# Altium PCB PCB.pcbdoc
Units mm, origin at the board's own origin, x right, y up, seen from the top; angles counter-clockwise.
Board outline 104.39 x 73.91 mm, 2 copper layers (Top Layer, Bottom Layer); 61 components, 39 nets, 209 pads, 35 vias.
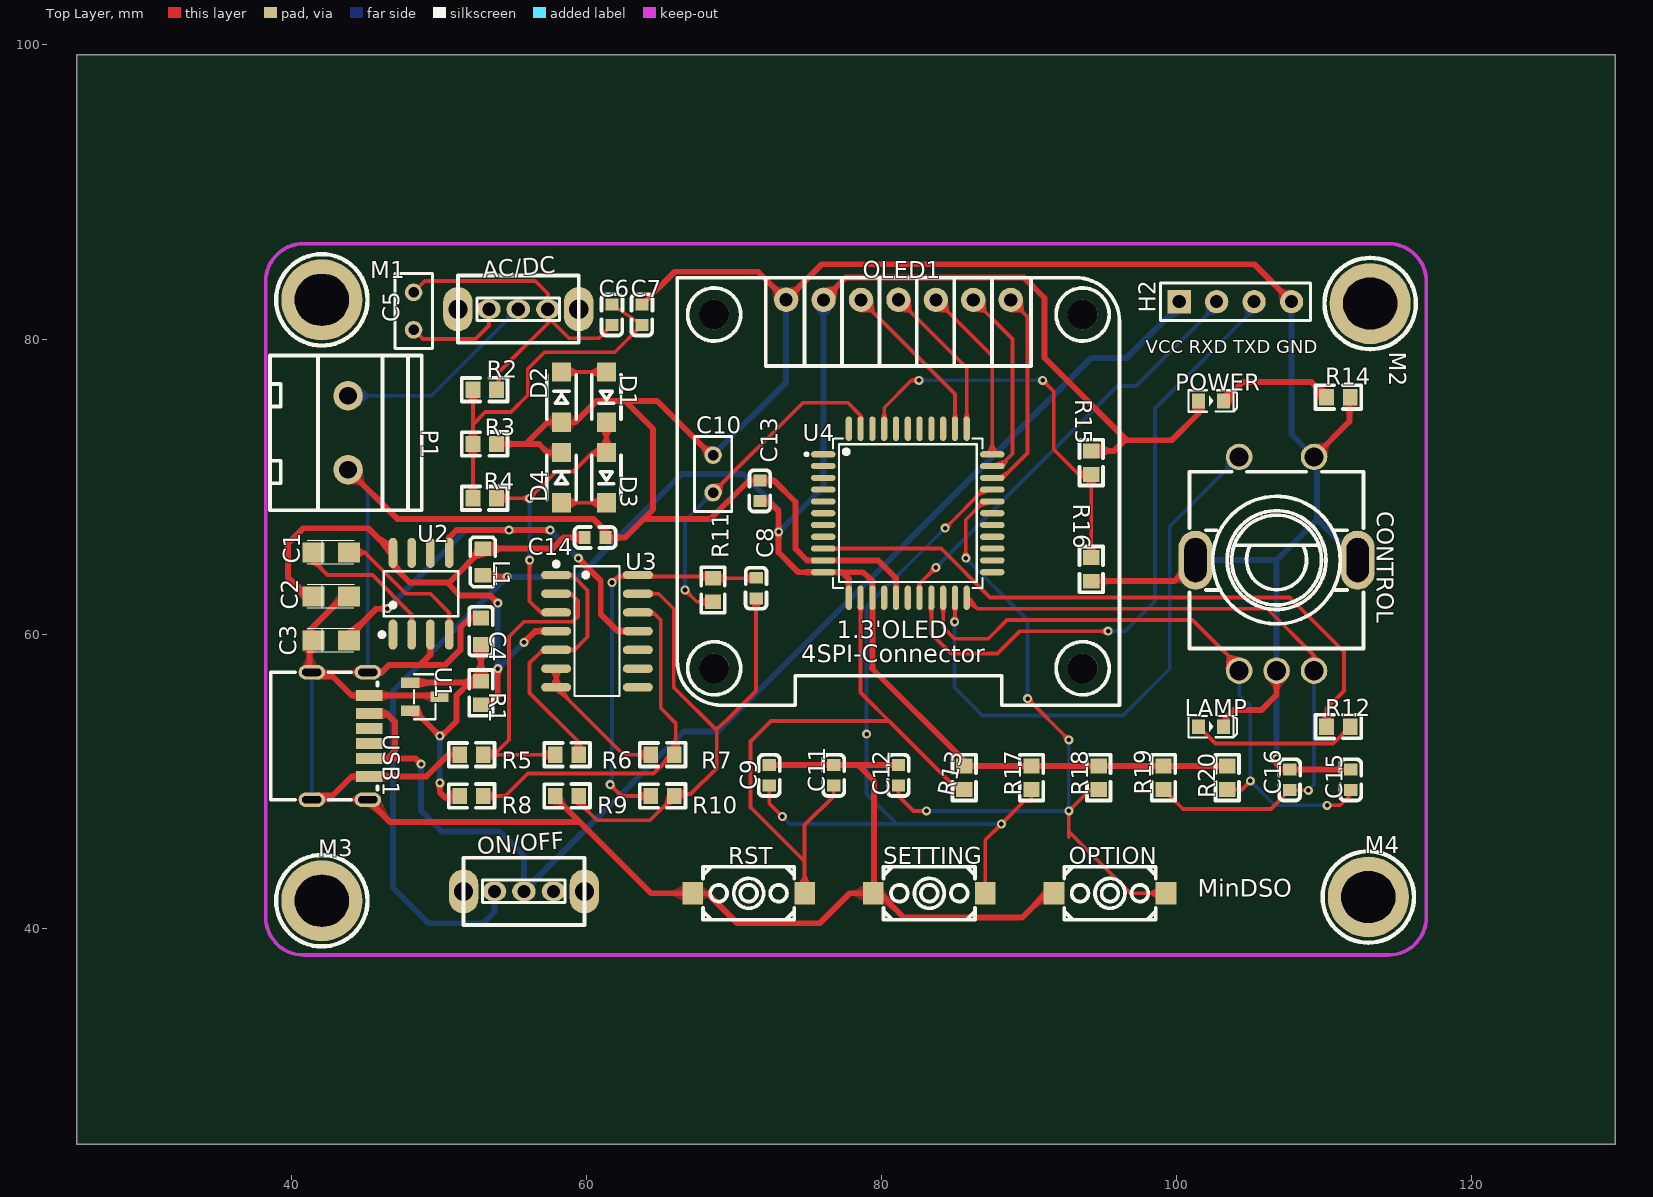
[diagram p0: Top Layer view]
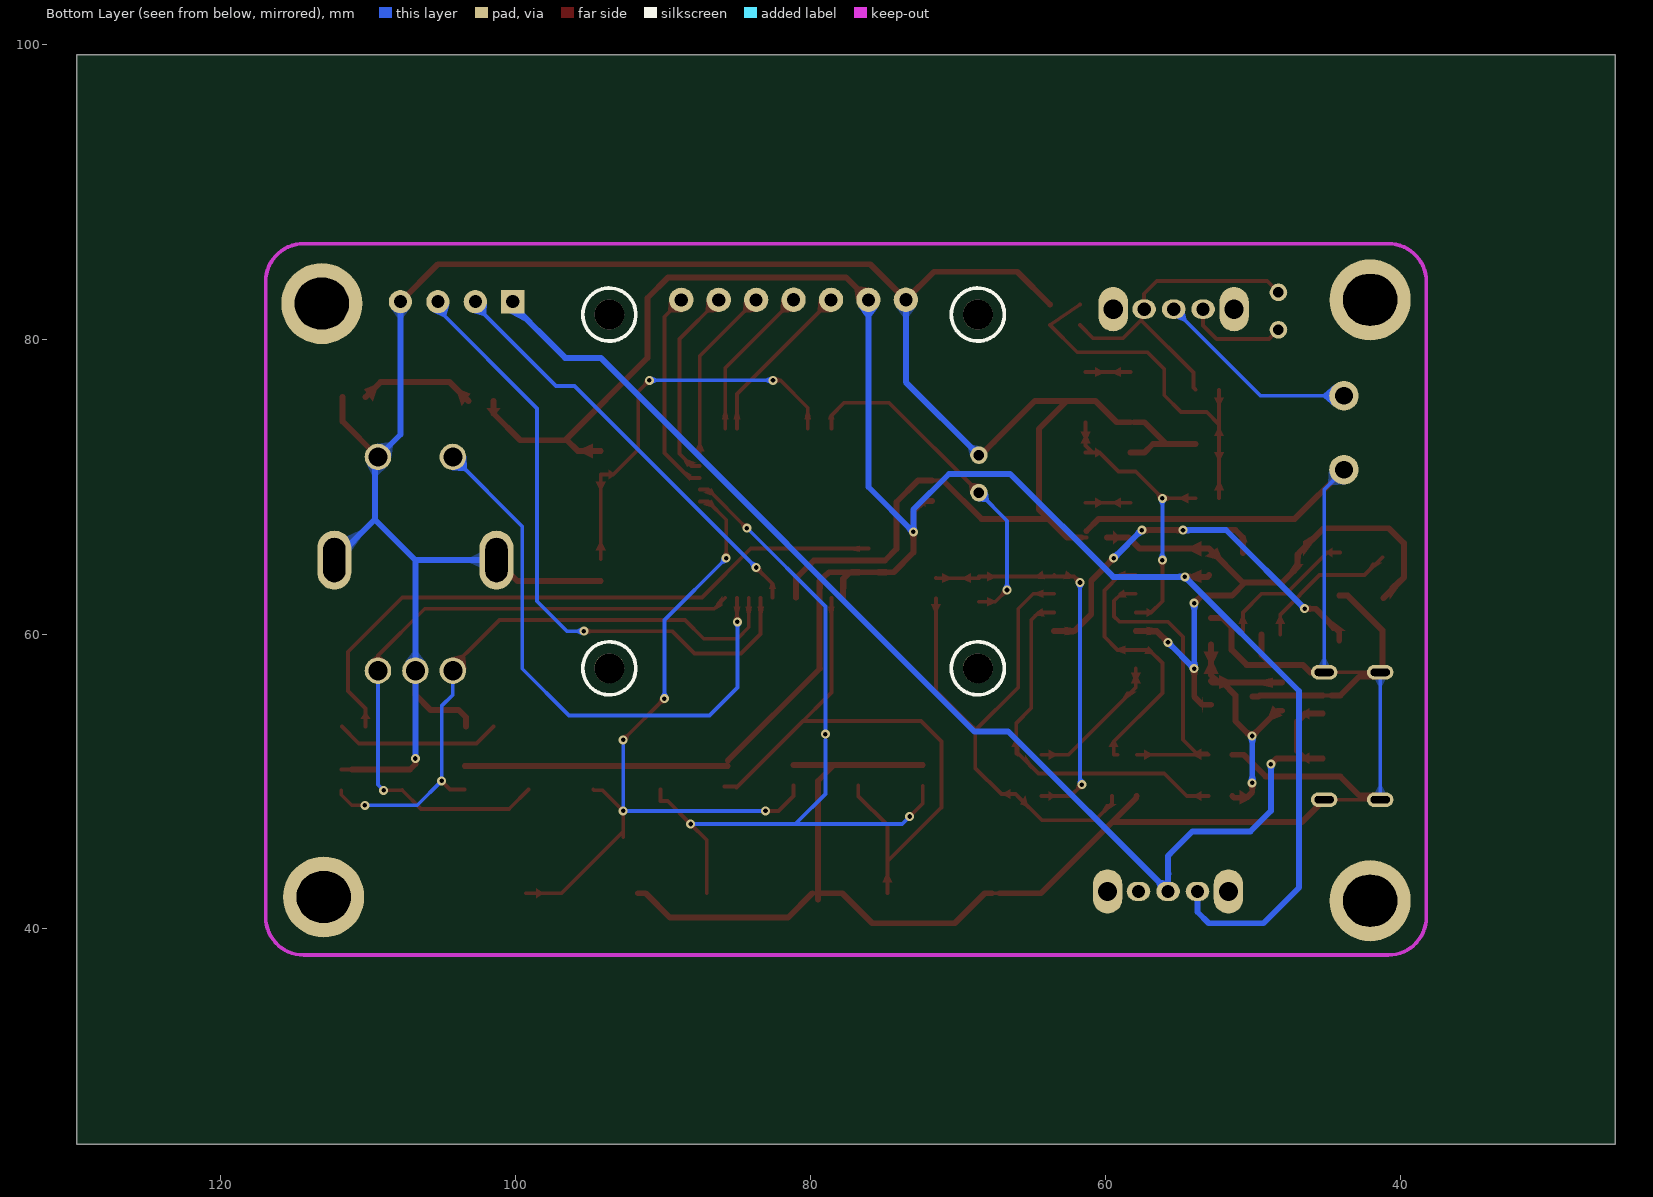
[diagram p1: Bottom Layer view, seen from below]

## Layer stack, top to bottom
Top Layer: signal copper (thickness not stored)
Dielectric: dielectric 0.32, FR-4, Dk 4.8
Bottom Layer: signal copper (thickness not stored)

## Board outline
129.794,25.4 25.4,25.4 25.4,99.314 129.794,99.314

## Components (designator, comment, footprint, x,y, rotation, side; value= is the part's Value field where it differs from the comment)
AC/DC "SS-12D02-VG4" SW-TH_SS-12D02-VG4 55.372,82.042 r0 top
C1 "10uF" CASE-A_3216 42.672,65.532 r0 top
C2 "10uF" CASE-A_3216 42.672,62.547 r0 top
C3 "10uF" CASE-A_3216 42.672,59.563 r0 top
C4 "4.7uf" C0603#1 52.832,60.198 r270 top
C5 "100nF(104)" CAP-TH_L5.0-W2.5-P2.54-D0.7 48.26,81.915 r90 top
C6 "30pF" C0603#2 61.722,81.661 r90 top
C7 "30pF" C0603#2 63.754,81.661 r90 top
C8 "1uF" C0603#2 71.501,63.119 r90 top
C9 "1uF" C0603#2 72.39,50.419 r90 top
C10 "1000pF" CAP-TH_L5.0-W2.5-P2.54-D0.7 68.58,70.866 r270 top
C11 "1uF" C0603#2 76.771,50.419 r90 top
C12 "1uF" C0603#2 81.151,50.419 r90 top
C13 "0.1uF" C0603#2 71.755,69.723 r90 top
C14 "0.1uF" C0603#2 60.579,66.548 r0 top
C15 "0.1uF" C0603#2 111.839,50.114 r90 top
C16 "0.1uF" C0603#2 107.696,50.114 r90 top
CONTROL "EC11E152U402" SW-TH_EC11XXXXXXXX 106.807,64.769 r0 top
D1 "1N4148W" SOD-123FL_L2.6-W1.6-LS3.4-RD 61.341,76.073 r270 top
D2 "1N4148W" SOD-123FL_L2.6-W1.6-LS3.4-RD 58.293,76.073 r90 top
D3 "1N4148W" SOD-123FL_L2.6-W1.6-LS3.4-RD 61.341,70.612 r270 top
D4 "1N4148W" SOD-123FL_L2.6-W1.6-LS3.4-RD 58.293,70.612 r90 top
H2 "HDR-F-2.54_1x4" HDR-M-2.54_1X4 104.013,82.55 r0 top
L1 "0.1uF" L0603 52.958,64.897 r270 top
LAMP "LED-0603_B" LED0603_BLUE 102.363,53.72 r0 top
M1 "M3螺丝孔 COPY" M3螺丝孔 42.037,82.677 r0 top
M2 "M3螺丝孔 COPY" M3螺丝孔 113.157,82.423 r0 top
M3 "M3螺丝孔 COPY" M3螺丝孔 42.037,41.91 r0 top
M4 "M3螺丝孔 COPY" M3螺丝孔 113.03,42.164 r0 top
OLED1 "0.96OLED_7P" 0.96OLED_7P 81.153,82.677 r0 top
ON/OFF "SS-12D02-VG4" SW-TH_SS-12D02-VG4 55.753,42.545 r0 top
OPTION "K2-3.6×6.1_SMD" KEY-SMD_2P-L6.2-W3.6-LS8.0 95.504,42.418 r0 top
P1 "WJ128V-5.0-2P" CONN-TH_2P-P5.00_WJ128V-5.0-2P 43.815,73.66 r270 top
POWER "LED-0603_G" LED0603_GREEN 102.363,75.818 r0 top
R1 "649Ω" R0603 52.832,56.007 r270 top
R2 "10K" R0603 53.087,76.581 r0 top
R3 "2k" R0603 53.087,72.898 r0 top
R4 "0Ω" R0603 53.086,69.215 r0 top
R5 "1.8k" R0603 52.197,51.816 r0 top
R6 "3.2k" R0603 58.674,51.816 r0 top
R7 "4.7k" R0603 65.151,51.816 r0 top
R8 "4.7k" R0603 52.197,49.022 r0 top
R9 "4.7k" R0603 58.674,49.022 r0 top
R10 "4.7k" R0603 65.151,49.022 r0 top
R11 "10Ω" R0603 68.58,62.992 r90 top
R12 "3.3k" R0603 110.998,53.721 r0 top
R13 "3.3k" R0603 85.621,50.258 r90 top
R14 "3.3k" R0603 110.998,76.073 r0 top
R15 "10K" R0603 94.235,71.628 r90 top
R16 "2K" R0603 94.235,64.389 r90 top
R17 "3.3k" R0603 90.182,50.258 r90 top
R18 "3.3k" R0603 94.742,50.258 r90 top
R19 "10k" R0603 99.139,50.258 r90 top
R20 "10k" R0603 103.463,50.258 r90 top
RST "K2-3.6×6.1_SMD" KEY-SMD_2P-L6.2-W3.6-LS8.0 70.993,42.418 r0 top
SETTING "K2-3.6×6.1_SMD" KEY-SMD_2P-L6.2-W3.6-LS8.0 83.248,42.418 r0 top
U1 "TL431" SOT-23-3_L2.9-W1.3-P1.90-LS2.4-BR 49.022,55.753 r180 top
U2 "ICL7660SCBAZ-T" SOIC-8_L4.9-W3.9-P1.27-LS6.0-BL 48.768,62.738 r0 top
U3 "TL074CDT" SOIC-14_L8.7-W3.9-P1.27-LS6.0-BL 60.706,60.198 r270 top
U4 "STC8A8K64S4A12-C83896" LQFP-44_L10.0-W10.0-P0.80-LS12.0-BL 81.788,68.199 r270 top
USB1 "TYPEC-250D-BCP6" USB-C-SMD_TYPEC-250D-BCP6 43.307,53.086 r270 top

## Footprints (in the part's own frame and the unit in brackets; to place one, negate y for a bottom-side part, rotate by r counter-clockwise, add the part's x,y. Pads: shape width x height; smd on the part's side, far side on the other; paste and mask are expansions set on the pad)
0.96OLED_7P [mm]
  round 1.65 hole 0.89: 1(-7.619,0.001) 2(-5.079,-0.004) 3(-2.539,-0.004) 4(0.001,0.004) 5(2.539,-0.001) 6(5.079,-0.001) 7(7.619,-0.004)
  round 2.032 hole 2.032 unplated: ""(-12.501,-24.997) ""(-12.501,-0.997) ""(12.498,-24.997) ""(12.498,-0.997)
  Top Layer pour cut-out: -12.5,-23 -11.632,-23.198 -10.936,-23.753 -10.55,-24.555 -10.55,-25.445 -10.936,-26.247 -11.632,-26.802 -12.5,-27 -12.5,-27 -13.368,-26.802 -14.064,-26.247 -14.45,-25.445 -14.45,-24.555 -14.064,-23.753 -13.368,-23.198 -12.5,-23 -12.5,-23 -12.5,-23
  Top Layer pour cut-out: 12.5,-23 13.368,-23.198 14.064,-23.753 14.45,-24.555 14.45,-25.445 14.064,-26.247 13.368,-26.802 12.5,-27 12.5,-27 11.632,-26.802 10.936,-26.247 10.55,-25.445 10.55,-24.555 10.936,-23.753 11.632,-23.198 12.5,-23 12.5,-23 12.5,-23
  Top Layer pour cut-out: 12.5,1 13.368,0.802 14.064,0.247 14.45,-0.555 14.45,-1.445 14.064,-2.247 13.368,-2.802 12.5,-3 12.5,-3 11.632,-2.802 10.936,-2.247 10.55,-1.445 10.55,-0.555 10.936,0.247 11.632,0.802 12.5,1 12.5,1 12.5,1 12.5,1
  Top Layer pour cut-out: -12.5,1 -11.632,0.802 -10.936,0.247 -10.55,-0.555 -10.55,-1.445 -10.936,-2.247 -11.632,-2.802 -12.5,-3 -12.5,-3 -13.368,-2.802 -14.064,-2.247 -14.45,-1.445 -14.45,-0.555 -14.064,0.247 -13.368,0.802 -12.5,1 -12.5,1 -12.5,1
  Bottom Layer pour cut-out: -12.5,-23 -11.632,-23.198 -10.936,-23.753 -10.55,-24.555 -10.55,-25.445 -10.936,-26.247 -11.632,-26.802 -12.5,-27 -12.5,-27 -13.368,-26.802 -14.064,-26.247 -14.45,-25.445 -14.45,-24.555 -14.064,-23.753 -13.368,-23.198 -12.5,-23 -12.5,-23 -12.5,-23
  Bottom Layer pour cut-out: 12.5,-23 13.368,-23.198 14.064,-23.753 14.45,-24.555 14.45,-25.445 14.064,-26.247 13.368,-26.802 12.5,-27 12.5,-27 11.632,-26.802 10.936,-26.247 10.55,-25.445 10.55,-24.555 10.936,-23.753 11.632,-23.198 12.5,-23 12.5,-23 12.5,-23
  Bottom Layer pour cut-out: 12.5,1 13.368,0.802 14.064,0.247 14.45,-0.555 14.45,-1.445 14.064,-2.247 13.368,-2.802 12.5,-3 12.5,-3 11.632,-2.802 10.936,-2.247 10.55,-1.445 10.55,-0.555 10.936,0.247 11.632,0.802 12.5,1 12.5,1 12.5,1 12.5,1
  Bottom Layer pour cut-out: -12.5,1 -11.632,0.802 -10.936,0.247 -10.55,-0.555 -10.55,-1.445 -10.936,-2.247 -11.632,-2.802 -12.5,-3 -12.5,-3 -13.368,-2.802 -14.064,-2.247 -14.45,-1.445 -14.45,-0.555 -14.064,0.247 -13.368,0.802 -12.5,1 -12.5,1 -12.5,1
  silkscreen extent -15,-27.5 15,1.5
C0603#1 [mm]
  rect 1x1.1 smd: 1(-0.9,0) 2(0.9,0)
  silkscreen extent -1.65,-0.8 1.65,0.8
C0603#2 [mm]
  rect 0.8x0.9 smd: 1(-0.7,0) 2(0.7,0)
  silkscreen extent -1.41,-0.71 1.39,0.72
CAP-TH_L5.0-W2.5-P2.54-D0.7 [mil]
  round 47 hole 28: 1(-50,0) 2(50,0)
  silkscreen extent -100,-50 100,50
CASE-A_3216 [mm]
  rect 1.5x1.359 smd: 1(-1.2,0) 2(1.2,0)
  silkscreen extent -1.64,-0.76 1.56,0.84
CONN-TH_2P-P5.00_WJ128V-5.0-2P [mm]
  round 2 hole 1.2: 1(-2.504,0) 2(2.504,0)
  silkscreen extent -5.25,-5.3 5.27,5
HDR-M-2.54_1X4 [mil]
  rect 62x62 hole 35: 1(-150,0)
  round 62 hole 35: 2(-50,0) 3(50,0) 4(150,0)
  silkscreen extent -200,-50 200,50
KEY-SMD_2P-L6.2-W3.6-LS8.0 [mm]
  rect 1.4x1.5 smd: 1(-3.8,0) 2(3.8,0)
  silkscreen extent -3.1,-1.8 3.1,1.8
L0603 [mm]
  rect 1x1.1 smd: 1(-0.9,0) 2(0.9,0)
  silkscreen extent -1.68,-0.85 1.68,0.85
LED0603_BLUE [mm]
  rect 0.9x1 smd: 1(-0.85,0) 2(0.85,0)
  silkscreen extent -1.54,-0.73 1.75,0.73
LED0603_GREEN [mm]
  rect 0.9x1 smd: 1(-0.85,0) 2(0.85,0)
  silkscreen extent -1.54,-0.73 1.75,0.73
LQFP-44_L10.0-W10.0-P0.80-LS12.0-BL [mm]
  oval 0.42x1.67 smd: 1(-4,-5.735) 2(-3.2,-5.735) 3(-2.4,-5.735) 4(-1.6,-5.735) 5(-0.8,-5.735) 6(0,-5.735) 7(0.8,-5.735) 8(1.6,-5.735) 9(2.4,-5.735) 10(3.2,-5.735) 11(4,-5.735) 23(4,5.735) 24(3.2,5.735) 25(2.4,5.735) 26(1.6,5.735) 27(0.8,5.735) 28(0,5.735) 29(-0.8,5.735) 30(-1.6,5.735) 31(-2.4,5.735) 32(-3.2,5.735) 33(-4,5.735)
  oval 1.67x0.42 smd: 12(5.735,-4) 13(5.735,-3.2) 14(5.735,-2.4) 15(5.735,-1.6) 16(5.735,-0.8) 17(5.735,0) 18(5.735,0.8) 19(5.735,1.6) 20(5.735,2.4) 21(5.735,3.2) 22(5.735,4) 34(-5.735,4) 35(-5.735,3.2) 36(-5.735,2.4) 37(-5.735,1.6) 38(-5.735,0.8) 39(-5.735,0) 40(-5.735,-0.8) 41(-5.735,-1.6) 42(-5.735,-2.4) 43(-5.735,-3.2) 44(-5.735,-4)
  silkscreen extent -5.08,-6.97 5.08,5.08
M3螺丝孔 [mm]
  round 5.5 hole 3.5 slot 3.675 at 0 deg: 1(0,0)
  silkscreen extent -3.1,-3.1 3.1,3.1
R0603 [mm]
  rect 1x1.1 smd: 1(-0.8,0) 2(0.8,0)
  silkscreen extent -1.55,-0.8 1.55,0.81
SOD-123FL_L2.6-W1.6-LS3.4-RD [mm]
  rect 1.3x1.3 smd: 1(1.7,0) 2(-1.7,0)
  silkscreen extent -1.5,-1 1.5,1
SOIC-8_L4.9-W3.9-P1.27-LS6.0-BL [mm]
  oval 0.588x2.045 smd: 1(-1.905,-2.773) 2(-0.635,-2.773) 3(0.635,-2.773) 4(1.905,-2.773) 5(1.905,2.773) 6(0.635,2.773) 7(-0.635,2.773) 8(-1.905,2.773)
  silkscreen extent -2.8,-2.92 2.53,1.52
SOIC-14_L8.7-W3.9-P1.27-LS6.0-BL [mm]
  oval 0.574x2.038 smd: 1(-3.81,-2.769) 2(-2.54,-2.769) 3(-1.27,-2.769) 4(0,-2.769) 5(1.27,-2.769) 6(2.54,-2.769) 7(3.81,-2.769) 8(3.81,2.769) 9(2.54,2.769) 10(1.27,2.769) 11(0,2.769) 12(-1.27,2.769) 13(-2.54,2.769) 14(-3.81,2.769)
  silkscreen extent -4.7,-2.92 4.4,1.52
SOT-23-3_L2.9-W1.3-P1.90-LS2.4-BR [mm]
  rect 1.25x0.7 smd: 1(1,-0.95) 2(1,0.95) 3(-1,0)
  silkscreen extent -0.73,-1.53 0.73,1.53
SW-TH_EC11XXXXXXXX [mm]
  oval 2.3x4 hole 1.5 slot 3 at 90 deg: 6(5.5,0.25) 7(-5.5,0.25)
  round 1.8 hole 1.3: A(-2.54,-7.25) B(2.54,-7.25) C(0,-7.25) D(-2.54,7.25) E(2.54,7.25)
  silkscreen extent -5.9,-5.75 5.9,6.25
SW-TH_SS-12D02-VG4 [mm]
  oval 1.6x1.3 hole 0.9: 1(-2,0) 2(-0.007,0) 3(2,0)
  oval 2x3 hole 1.3: 4(4.1,0) 5(-4.1,0)
  silkscreen extent -4.1,-2.29 4.1,2.29
USB-C-SMD_TYPEC-250D-BCP6 [mm]
  oval 1x1.8 hole 0.5 slot 1.3 at 90 deg: 1(-4.32,1.85) 2(-4.32,-1.95) 3(4.32,-1.95) 4(4.32,1.85)
  rect 0.75x1.8 smd: A5(-0.5,1.95) A9(1.52,1.95) A12(2.75,1.95) B5(0.5,1.95) B9(-1.52,1.95) B12(-2.75,1.95)
  silkscreen extent -4.32,-4.74 4.32,2.5

## Via types
v1: diameter 0.61, hole 0.31, Top Layer to Bottom Layer, 35 vias

## Nets (pads, with @x,y where several pads share a name; then routed paths per layer and width w, separated by ;. In a path a pad name is that pad's centre, name@x,y a point inside that pad or via, vN(x,y) a via of type N, cw(c..) or ccw(c..) an arc to the next point about the centre after c; other vN are vias at no path point)
+5V: C13.1 L1.2 OLED1.2 ON/OFF.1 POWER.1 R13.2 R15.2 R17.2 R18.2 R19.2 R20.2 U4.11 U4.12 U4.14 | length 160.2
  Top Layer w0.4: L1.2 53.076,63.881 v1(54.61,63.881) ; C13.1 72.329,69.022 73.025,68.326 v1(73.025,66.929) 73.025,65.532 74.358,64.198 U4.11 78.74,64.198 79.388,63.614 U4.14 79.388,57.772 ; OLED1.2@76.563,83.167 77.597,84.201 89.662,84.201 91.059,82.804 91.059,78.74 96.647,73.152 97.216,73.152 ; 77.343,64.198 77.787,63.754 U4.12 ; 79.365,57.668 R13.2@85.598,51.435 ; R13.2 R17.2 R18.2 R19.2 R20.2 ; R15.2 95.796,72.428 96.52,73.152 99.695,73.152 101.511,74.968 POWER.1@101.511,75.819
  Bottom Layer w0.4: ON/OFF.1 53.754,41.148 52.992,40.386 49.276,40.386 46.863,42.799 46.863,56.134 v1(54.61,63.881) ; 54.148,63.419 v1(54.61,63.881) ; OLED1.2 76.074,69.978 v1(73.025,66.929) 73.025,68.453 70.612,70.866 66.459,70.866 59.474,63.881 v1(54.61,63.881)
AC/DC_1: AC/DC.1 C5.1 | length 6.9
  Top Layer w0.26: C5.1 48.895,80.01 52.451,80.01 53.372,80.931 AC/DC.1
AC/DC_3: AC/DC.3 C5.2 C6.1 R2.2 | length 22.2
  Top Layer w0.26: C5.2 49.022,83.947 56.515,83.947 57.371,83.091 AC/DC.3 ; R2.2 54.025,76.719 54.025,77.736 57.581,81.292 ; 57.531,81.342 58.801,80.072 60.833,80.072 C6.1
ADC_IN: C10.2 R11.1 U4.43 | length 23.4
  Top Layer w0.254: v1(66.675,62.992) 67.475,62.192 R11.1
  Top Layer w0.26: C10.2 74.676,75.692 77.724,75.692 78.588,74.828 U4.43
  Bottom Layer w0.26: v1(66.675,62.992) 66.675,67.691 C10.2
C1_1: C1.1 U2.2 | length 9.9
  Top Layer w0.26: C1.1@41.209,65.217 42.418,64.008 45.466,64.008 48.133,61.341 U2.2
C1_2: C1.2 U2.4 | length 9.8
  Top Layer w0.26: C1.2@44.069,65.532 44.917,65.532 ; 44.958,65.532 45.179,65.311 47.752,62.738 49.403,62.738 50.673,61.468 U2.4
C6_2: C6.2 C7.1 R2.1 R3.1 R4.1 | length 25.1
  Top Layer w0.254: R3.1 R2.1 ; C6.2 C7.1
  Top Layer w0.26: R4.1 R3.1 ; 52.286,74.229 53.129,75.057 54.864,75.057 56.007,76.2 56.007,77.978 57.15,79.121 61.914,79.121 C7.1
CERTAIN: C12.1 OPTION.2 R18.1 U4.29 | length 50
  Top Layer w0.254: v1(89.916,55.626) v1(92.71,52.832) ; v1(92.71,48.006) 94.107,49.403 94.686,49.403 R18.1
  Top Layer w0.26: C12.1 81.151,49.027 82.169,48.006 82.677,48.006 v1(83.058,48.006) ; v1(85.725,65.151) 85.725,67.754 86.97,68.999 U4.29 ; 92.71,46.228 v1(92.71,48.006) ; 92.71,46.609 96.901,42.418 98.311,42.418 OPTION.2
  Bottom Layer w0.254: v1(83.058,48.006) v1(92.71,48.006) 92.71,52.451 ; v1(85.725,65.151) 89.916,60.96 v1(89.916,55.626)
D1_2: D1.2 D2.1 | length 3
  Top Layer w0.26: D2.1 D1.2
D3_1: D3.1 D4.2 | length 3
  Top Layer w0.26: D4.2 D3.1
GND: C2.2 C3.1 C4.1 C7.2 C9.2 C10.1 C11.2 C12.2 C13.2 C14.2 C15.2 C16.2 CONTROL.6 CONTROL.7 CONTROL.C CONTROL.E D2.2 D4.1 H2.4 LAMP.2 OLED1.1 OPTION.1 P1.2 R3.2 R5.1 R9.1 R14.2 R16.1 RST.1 SETTING.1 U1.3 U2.3 U4.10 U4.16 USB1.1 USB1.2 USB1.3 USB1.4 USB1.A12 USB1.B12 | length 346.5
  Top Layer w0.26: USB1.3 44.064,48.765 USB1.4 ; USB1.2 44.064,57.407 USB1.1 ; USB1.B12@44.661,55.837 USB1.B12 ; D2.2@58.062,74.374 D2.2 ; C14.2 C14.2@61.625,66.548 ; RST.1 RST.1@67.688,42.418 ; 71.013,70.424 71.384,70.424 C13.2 ; 111.097,50.813 C15.2
  Top Layer w0.4: C3.1@41.209,59.182 41.209,60.259 43.561,62.611 C2.2@44.135,62.611 ; C3.1@41.209,59.563 41.209,58.59 41.209,57.554 USB1.2 41.656,57.107 42.794,57.107 44.064,55.837 USB1.B12@44.661,55.837 ; USB1.3 41.656,49.065 42.794,49.065 44.064,50.335 USB1.A12 49.126,50.335 50.604,51.816 R5.1 ; P1.2 47.153,67.818 60.452,67.818 C14.2@61.28,66.99 ; USB1.4 46.678,47.244 59.482,47.244 ; USB1.1 46.104,57.407 46.609,57.912 48.725,57.912 49.403,58.59 U2.3 ; USB1.B12 49.53,55.837 49.614,55.753 U1.3 ; 48.768,57.912 50.419,57.912 51.435,58.928 51.435,60.452 52.08,61.097 C4.1 ; R3.2 56.764,72.898 ; 55.872,72.898 57.351,74.374 D2.2@58.062,74.374 ; 56.769,72.898 57.356,72.311 ; 57.351,72.311 D4.1 ; R9.1 57.904,48.992 57.904,48.877 58.666,48.115 64.364,42.418 RST.1 ; D2.2 59.235,74.374 60.681,75.819 64.77,75.819 67.551,73.038 68.453,72.136 C10.1 ; C14.2@61.625,66.548 62.611,66.548 64.516,68.453 64.516,73.909 62.738,75.692 ; C7.2 65.974,84.582 71.631,84.582 OLED1.1 ; 63.876,67.818 68.407,67.818 71.013,70.424 ; RST.1@67.688,42.418 68.186,42.418 70.218,40.386 75.819,40.386 77.851,42.418 SETTING.1 ; C13.2 72.705,70.424 73.2,69.929 ; C9.2 C11.2 79.449,51.12 C12.2 ; 72.771,70.358 74.168,68.961 74.168,65.786 74.955,64.999 U4.10 79.781,64.999 80.988,63.792 U4.16 ; OLED1.1 75.946,85.09 105.283,85.09 H2.4 ; 78.23,51.12 78.42,51.12 79.502,50.038 SETTING.1@79.502,41.996 ; SETTING.1@79.883,42.418 81.534,40.767 89.535,40.767 91.186,42.418 OPTION.1 ; R16.1 99.878,63.589 CONTROL.7 ; LAMP.2@103.378,53.721 103.378,54.356 103.886,54.864 105.791,54.864 106.807,55.88 CONTROL.C ; v1(106.807,51.562) 106.807,51.181 107.173,50.813 C16.2 111.097,50.813 ; CONTROL.E 111.76,74.432 R14.2@111.76,76.073
  Bottom Layer w0.26: USB1.3 USB1.2 ; P1.2 45.156,69.814 USB1.1
  Bottom Layer w0.4: C10.1 73.534,77.09 OLED1.1 ; CONTROL.7 106.807,65.019 ; v1(106.807,51.562) CONTROL.C@106.807,57.137 ; CONTROL.C 106.807,65.019 ; H2.4 107.823,73.543 CONTROL.E 109.558,72.019 109.558,67.77 ; CONTROL.6 109.558,67.77 ; 106.807,65.019 109.558,67.77
LAMP_1: LAMP.1 R12.2 | length 11.2
  Top Layer w0.26: LAMP.1 102.654,52.578 110.655,52.578 R12.2
OUT_+2.5V: C4.2 R1.1 R8.1 U1.1 U1.2 | length 20.6
  Top Layer w0.26: R1.1@52.41,56.807 R1.1
  Top Layer w0.4: U1.2 48.321,54.803 v1(50.038,53.086) 50.165,53.086 51.181,54.102 51.181,55.855 52.019,56.693 ; U1.1 52.728,56.703 R1.1 ; v1(50.038,49.911) 50.038,49.276 50.419,48.895 51.27,48.895 R8.1 ; R1.1@52.41,56.807 52.832,57.229 C4.2
  Bottom Layer w0.4: v1(50.038,49.911) v1(50.038,53.086)
OUT_+5V: C2.1 C14.1 L1.1 R1.2 U2.8 U3.4 | length 45.3
  Top Layer w0.26: U2.8@46.863,65.179 U2.8@46.863,65.509
  Top Layer w0.4: C2.1@41.148,62.436 39.751,63.833 39.751,66.167 40.767,67.183 45.189,67.183 U2.8@46.863,65.509 ; U2.8 46.972,65.402 46.972,64.534 48.006,63.5 50.673,63.5 L1.1 56.164,65.796 57.668,65.796 58.42,66.548 59.187,66.548 C14.1 ; 50.523,63.5 51.412,62.611 53.467,62.611 v1(53.975,62.103) ; R1.2 53.429,55.207 53.975,55.753 v1(53.975,57.658) ; v1(55.753,59.436) 56.515,60.198 U3.4
  Bottom Layer w0.4: v1(53.975,62.103) v1(53.975,57.658) v1(55.753,59.436)
OUT_-5V: C3.2 U2.5 U3.11 | length 32.3
  Top Layer w0.4: C3.2@44.135,59.563 44.135,60.137 45.72,61.722 v1(46.482,61.722) ; U2.5 50.673,66.548 51.181,67.056 v1(54.737,67.056) v1(57.531,67.056) ; v1(59.436,65.151) 60.96,63.627 60.96,61.341 62.103,60.198 U3.11
  Bottom Layer w0.4: v1(46.482,61.722) 51.816,67.056 v1(54.737,67.056) ; v1(57.531,67.056) v1(59.436,65.151)
OUT_LV: D1.1 D3.2 R4.2 U3.3 | length 20.1
  Top Layer w0.26: R4.2 54.282,69.215 v1(56.134,69.215) 57.94,71.021 59.108,71.021 60.399,72.311 D3.2@60.871,72.311 ; v1(56.134,65.024) 56.134,62.23 56.896,61.468 U3.3 ; D3.2 D3.2@60.871,72.311 ; D1.1 61.341,72.784 D3.2@60.871,72.311
  Bottom Layer w0.26: v1(56.134,65.024) v1(56.134,69.215)
OUT_ZF: R7.1 U3.6 U3.7 | length 9.6
  Top Layer w0.26: U3.6 U3.7 62.509,51.816 R7.1
P1_1: AC/DC.2 P1.1 | length 14
  Bottom Layer w0.26: P1.1 49.487,76.164 AC/DC.2
P3.2: C15.1 CONTROL.A R20.1 U4.20 | length 42.7
  Top Layer w0.254: U4.20 84.188,60.465 84.963,59.69 87.249,59.69 88.519,60.96 101.092,60.96 101.478,60.576 ; v1(110.236,48.387) 111.125,48.387 111.839,49.101 C15.1
  Top Layer w0.26: 101.092,60.96 102.347,59.71 CONTROL.A@104.417,57.645 ; R20.1 104.305,49.459 104.45,49.459 v1(105.029,50.038)
  Bottom Layer w0.254: CONTROL.A 104.267,55.88 105.029,55.118 v1(105.029,50.038) 106.68,48.387 v1(110.236,48.387)
P3.3: CONTROL.D U4.21 | length 39.1
  Top Layer w0.26: v1(84.963,60.833) 84.988,60.858 U4.21
  Bottom Layer w0.26: v1(84.963,60.833) 84.963,56.388 86.868,54.483 96.393,54.483 99.56,57.65 99.56,67.31 CONTROL.D
P3.4: C16.1 CONTROL.B R19.1 U4.22 | length 45
  Top Layer w0.254: R19.1 100.409,48.189 100.457,48.133
  Top Layer w0.26: U4.22 86.53,61.722 106.172,61.722 109.347,58.547 CONTROL.B ; 100.457,48.133 106.426,48.133 C16.1@107.696,49.403 ; C16.1 107.706,49.403 v1(108.966,49.403)
  Bottom Layer w0.26: v1(108.966,49.403) 109.347,49.784 CONTROL.B@109.347,57.137
R14_1: POWER.2 R14.1 | length 7.9
  Top Layer w0.4: POWER.2 104.483,77.089 109.182,77.089 R14.1
RST: C11.1 R13.1 RST.2 U4.13 | length 44.6
  Top Layer w0.26: 71.12,48.242 71.12,52.705 72.517,54.102 78.613,54.102 ; 71.139,48.241 74.793,44.587 ; RST.2 74.793,47.048 76.772,49.027 C11.1 ; 74.793,44.704 74.793,44.968 ; U4.13 78.583,56.037 80.869,53.751 ; 78.74,54.102 80.416,54.102 ; 80.518,54.102 85.034,49.586 ; 85.011,49.657 R13.1@85.852,49.657
RXD: H2.2 U4.18 | length 29.2
  Top Layer w0.26: U4.18 82.588,63.411 v1(83.693,64.516)
  Bottom Layer w0.26: v1(83.693,64.516) 96.012,76.835 97.282,76.835 102.743,82.296 H2.2
SETTING: C9.1 R17.1 SETTING.2 U4.30 | length 53.5
  Top Layer w0.254: C9.1 72.39,48.514 v1(73.279,47.625) ; v1@88.042,47.198 88.123,47.117 v1(88.138,47.117)
  Top Layer w0.26: v1(84.328,67.183) 86.944,69.799 U4.30 ; SETTING.2 87.048,46.027 v1(88.138,47.117) 89.687,48.666 90.183,48.666 R17.1
  Bottom Layer w0.254: v1(73.279,47.625) 73.787,47.117 81.158,47.117 ; 78.994,52.832 78.994,49.149 80.899,47.244 81.026,47.117 v1(88.138,47.117)
  Bottom Layer w0.26: v1(78.994,53.213) 78.994,61.877 84.3,67.183 v1(84.328,67.183)
TXD: H2.3 U4.19 | length 42.8
  Top Layer w0.26: U4.19 83.388,59.995 84.709,58.674 87.884,58.674 89.408,60.198 v1(95.377,60.198)
  Bottom Layer w0.254: v1(95.377,60.198) 96.52,60.198 98.552,62.23 98.552,75.311 105.283,82.042 H2.3
U3_1: R6.2 U3.1 U3.5 | length 18.2
  Top Layer w0.26: U3.1 59.027,64.008 60.071,62.964 60.071,59.817 59.182,58.928 U3.5 57.023,58.928 56.134,58.039 56.134,56.007 59.436,52.705 59.436,51.816 R6.2@59.182,51.816
U3_2: R5.2 R6.1 U3.2 | length 22
  Top Layer w0.26: 54.737,53.183 54.737,59.817 55.753,60.833 59.055,60.833 59.408,61.186 59.408,62.258 58.928,62.738 U3.2 ; 54.737,53.213 54.737,52.832 53.818,51.913 53.094,51.913 R5.2 55.931,51.816 R6.1
U3_12: R7.2 R8.2 U3.12 | length 26.2
  Top Layer w0.254: U3.12 64.491,61.468 64.77,61.214 65.024,60.96 65.024,54.991 66.04,53.975 66.04,51.905 R7.2
  Top Layer w0.26: R8.2 54.483,49.022 56.007,50.546 64.544,50.546 65.951,51.953 65.951,52.235 R7.2
U3_13: C8.1 R9.2 R10.2 U3.13 | length 36.6
  Top Layer w0.26: R9.2@59.563,49.022 59.563,48.514 60.706,47.371 64.3,47.371 R10.2 66.078,49.149 67.056,49.149 68.834,50.927 68.834,53.467 65.913,56.388 65.913,61.722 64.897,62.738 U3.13 ; 68.834,53.576 69.596,54.229 71.501,56.134 71.501,61.455 C8.1
U3_14: C8.2 R10.1 R11.2 U3.14 | length 27.2
  Top Layer w0.26: v1(61.595,49.784) 62.357,49.022 63.558,49.022 R10.1 ; v1(61.722,63.5) 62.121,63.899 U3.14@63.475,63.899 ; U3.14 U3.14@63.475,63.899 ; C8.2 71.501,63.792 R11.2 68.58,63.899 U3.14@63.475,63.899
  Bottom Layer w0.26: v1@61.595,49.657 61.722,49.784 v1(61.722,63.5)
U4_9: R12.1 U4.9 | length 43.8
  Top Layer w0.26: U4.9 84.061,65.799 87.376,62.484 107.696,62.484 111.379,58.801 111.379,56.134 110.198,54.953 110.198,54.564 R12.1
U4_31: OLED1.7 U4.31 | length 13.9
  Top Layer w0.26: U4.31 88.222,70.599 89.916,72.293 89.916,81.529 OLED1.7@88.773,82.674
U4_32: OLED1.6 U4.32 | length 13.3
  Top Layer w0.26: OLED1.6 88.9,80.007 88.9,72.23 88.069,71.399 U4.32
U4_33: OLED1.5 U4.33 | length 12.1
  Top Layer w0.26: OLED1.5 87.523,78.844 U4.33
U4_34: OLED1.4 U4.34 | length 10.7
  Top Layer w0.26: OLED1.4@81.153,82.68 85.788,78.047 U4.34
U4_35: OLED1.3 U4.35 | length 11.4
  Top Layer w0.26: OLED1.3@78.613,82.674 84.988,76.299 U4.35
VADC_IN: R15.1 R16.2 U4.41 | length 26.9
  Top Layer w0.254: U4.41 80.188,75.362 82.042,77.216 v1(82.55,77.216) ; v1(90.932,77.216) 91.694,76.454 91.694,72.517 93.383,70.828 R15.1
  Top Layer w0.26: R16.2@94.234,65.1 R15.1
  Bottom Layer w0.254: v1(82.55,77.216) v1(90.932,77.216)
VCC: H2.1 ON/OFF.2 USB1.A9 USB1.B9 | length 84.9
  Top Layer w0.26: USB1.A9 46.449,51.567
  Top Layer w0.4: USB1.A9 46.487,51.567 46.99,52.07 46.99,54.064 46.449,54.605 USB1.B9 ; 46.449,51.567 48.382,51.567 v1(48.768,51.181)
  Bottom Layer w0.4: v1(48.768,51.181) 48.768,48.006 50.165,46.609 54.102,46.609 55.626,45.085 55.745,44.958 ON/OFF.2 66.596,53.393 68.887,53.393 94.234,78.74 96.647,78.74 100.457,82.55 H2.1
pads on no net: AC/DC.4 AC/DC.5 M1.1 M2.1 M3.1 M4.1 OLED1. ON/OFF.3 ON/OFF.4 ON/OFF.5 U2.1 U2.6 U2.7 U3.8 U3.9 U3.10 U4.1 U4.2 U4.3 U4.4 U4.5 U4.6 U4.7 U4.8 U4.15 U4.17 U4.23 U4.24 U4.25 U4.26 U4.27 U4.28 U4.36 U4.37 U4.38 U4.39 U4.40 U4.42 U4.44 USB1.A5 USB1.B5

## Polygon pours and split planes (outlines as drawn)
GND on Top Layer (solid): 38.227,86.487 38.227,38.227 116.967,38.227 116.967,86.487 38.227,86.487
GND on Bottom Layer (solid): 38.227,86.487 38.227,38.227 116.967,38.227 116.967,86.487 38.227,86.487

## Keep-outs
Keep-Out Layer:
  lines w0.254: 38.227,40.808 ccw(c40.808,40.808) 40.808,38.227 ; 38.227,83.906 cw(c40.808,83.906) 40.808,86.487 ; 114.386,38.227 ccw(c114.386,40.808) 116.967,40.808 ; 114.386,86.487 cw(c114.386,83.906) 116.967,83.906

## Other copper
Top Layer:
  region net OUT_-5V: 62.743,59.911 62.743,60.485 62.143,60.398 62.143,59.998
  region net U3_12: 64.268,61.748 64.146,61.188 64.548,61.244 64.61,61.531
  region net U3_13: 64.207,62.451 64.207,63.025 64.597,62.868 64.597,62.608
  region net U3_14: 64.287,64.284 64.127,63.732 64.544,63.769 64.619,64.029
  region net U3_14: 62.823,63.732 62.663,64.284 62.331,64.029 62.407,63.769
  region net OUT_ZF: 58.549,56.101 57.899,56.101 58.431,55.711 58.798,55.711
  region net OUT_ZF: 57.612,56.675 58.262,56.675 58.067,57.065 57.807,57.065
  region net OUT_ZF: 58.262,57.371 57.612,57.371 57.807,56.981 58.067,56.981
  region net U3_1: 58.669,58.641 58.669,59.215 59.059,59.058 59.059,58.798
  region net U3_1: 57.33,58.669 57.08,59.187 56.794,58.883 56.913,58.635
  region net OUT_+5V: 57.205,59.911 57.205,60.485 56.605,60.398 56.605,59.998
  region net OUT_LV: 57.205,61.181 57.205,61.755 56.896,61.598 56.896,61.338
  region net U3_2: 58.753,63.012 58.585,62.464 58.999,62.483 59.085,62.765
  region net U3_1: 58.669,63.721 58.669,64.295 59.027,64.138 59.027,63.878
  region net OUT_-5V: 50.967,66.239 50.379,66.239 50.473,66.548 50.873,66.548
  region net OUT_+5V: 47.157,64.811 46.57,64.753 47.118,64.105 47.483,64.306
  region net OUT_+5V: 46.569,65.303 46.576,66.303 45.969,66.686 45.969,66.12
  region net C1_2: 50.967,60.694 50.379,60.694 50.543,61.084 50.803,61.084
  region net C1_1: 48.427,60.694 47.839,60.694 48.003,61.084 48.263,61.084
  region net ADC_IN: 78.798,74.559 78.378,74.559 78.458,74.828 78.718,74.829
  region net VADC_IN: 80.398,74.559 79.978,74.559 80.061,74.94 80.315,74.94
  region net U4_35: 85.198,74.559 84.778,74.559 84.858,74.949 85.118,74.949
  region net U4_34: 85.998,74.559 85.578,74.559 85.659,74.949 85.918,74.949
  region net U4_33: 87.198,72.409 87.848,72.409 87.653,72.799 87.393,72.799
  region net U4_32: 87.754,71.609 88.354,71.359 88.561,71.707 88.298,71.812
  region net U4_31: 88.102,70.809 88.193,70.394 88.58,70.774 88.441,71.002
  region net SETTING: 87.245,69.589 86.718,69.908 86.527,69.566 86.756,69.428
  region net CERTAIN: 87.283,68.789 86.714,69.1 86.496,68.709 86.751,68.597
  region net P3.4: 85.998,62.579 85.998,61.929 86.388,61.68 86.388,62.048
  region net P3.3: 85.198,61.839 84.778,61.839 84.858,61.449 85.118,61.449
  region net P3.2: 84.398,61.839 83.978,61.839 84.061,61.458 84.315,61.458
  region net TXD: 83.598,61.839 83.178,61.839 83.258,61.449 83.518,61.449
  region net RXD: 82.798,63.089 82.378,63.089 82.458,63.411 82.718,63.411
  region net +5V: 79.598,63.089 79.178,63.089 79.188,63.614 79.588,63.614
  region net RST: 78.798,61.838 78.378,61.84 78.457,61.449 78.717,61.448
  region net +5V: 77.998,63.089 77.578,63.089 77.588,63.689 77.987,63.689
  region net +5V: 76.678,64.409 76.678,63.989 77.278,63.999 77.278,64.398
  region net +5V: 75.428,63.989 75.428,64.409 74.828,64.398 74.828,63.999
  region net U4_9: 76.678,66.009 76.678,65.589 77.068,65.669 77.068,65.929
  region net D3_1: 58.943,69.238 58.943,68.588 59.333,68.783 59.333,69.043
  region net D3_1: 60.691,68.588 60.691,69.238 60.301,69.043 60.301,68.783
  region net OUT_LV: 60.691,71.986 60.691,72.636 60.399,72.441 60.399,72.181
  region net OUT_LV: 61.016,72.962 61.666,72.962 61.471,73.352 61.211,73.352
  region net D1_2: 58.943,78.097 58.943,77.447 59.333,77.642 59.333,77.902
  region net OUT_LV: 61.666,73.723 61.016,73.723 61.211,73.333 61.471,73.333
  region net D1_2: 60.691,77.447 60.691,78.097 60.301,77.902 60.301,77.642
  region net OUT_+5V: 59.479,66.098 59.479,66.998 59.187,66.748 59.187,66.348
  region net +5V: 72.205,69.423 72.205,68.623 72.329,68.822 72.329,69.222
  region net OUT_-5V: 43.74,60.242 44.622,60.242 45.123,60.842 44.558,60.842
  region net OUT_+5V: 40.722,62.362 40.722,63.227 40.122,63.745 40.122,63.179
  region net C1_2: 44.622,65.857 44.622,65.207 44.917,65.402 44.917,65.662
  region net C1_1: 41.898,64.853 41.248,64.853 41.78,64.463 42.147,64.463
  region net VCC: 46.157,51.892 46.157,51.242 46.449,51.437 46.449,51.697
  region net VCC: 46.157,51.941 46.157,51.191 46.487,51.367 46.487,51.767
  region net VCC: 46.157,54.981 46.157,54.231 46.449,54.405 46.449,54.805
  region net OUT_+2.5V: 48.647,55.153 48.002,54.453 48.612,54.229 48.883,54.524
  region net OUT_+2.5V: 48.647,57.053 48.647,56.353 49.247,56.503 49.247,56.903
  region net U3_14: 63.851,48.697 63.851,49.347 63.558,49.152 63.558,48.892
  region net U3_13: 65.774,48.472 65.451,49.036 65.286,48.54 65.419,48.306
  region net U3_13: 66.451,49.474 66.451,48.824 66.841,49.019 66.841,49.279
  region net U3_2: 53.497,52.141 53.497,51.491 53.887,51.686 53.887,51.946
  region net U3_2: 53.497,52.237 53.497,51.587 53.817,51.782 53.817,52.042
  region net U4_9: 109.873,54.271 110.523,54.271 110.328,54.564 110.068,54.564
  region net OUT_+2.5V: 52.282,56.307 52.282,57.203 51.682,56.903 51.682,56.503
  region net OUT_+2.5V: 52.332,57.307 53.332,57.307 53.032,57.907 52.632,57.907
  region net OUT_+5V: 53.382,55.707 53.382,54.707 53.429,55.007 53.429,55.407
  region net C6_2: 51.961,69.765 52.611,69.765 52.416,70.155 52.156,70.155
  region net OUT_LV: 54.386,69.54 54.386,68.89 54.776,69.085 54.776,69.345
  region net ADC_IN: 68.03,61.874 68.03,62.509 67.649,62.319 67.649,62.065
  region net U3_14: 68.03,63.574 68.03,64.224 67.64,64.029 67.64,63.769
  region net U3_14: 69.13,64.117 69.13,63.467 69.52,63.662 69.52,63.922
  region net R14_1: 109.698,75.804 110.272,76.623 109.701,76.853 109.468,76.521
  region net U3_13: 59.93,48.472 59.28,48.472 59.811,48.082 60.179,48.082
  region net OUT_ZF: 63.851,51.491 63.851,52.141 63.461,51.946 63.461,51.686
  region net U3_12: 65.451,51.266 65.451,51.778 65.061,51.247 65.061,50.879
  region net U3_12: 65.722,52.366 66.358,52.366 66.167,52.747 65.913,52.747
  region net OUT_+2.5V: 50.897,48.472 50.897,49.395 50.419,49.095 50.419,48.695
  region net U3_12: 53.497,49.347 53.497,48.697 53.887,48.892 53.887,49.152
  region net U3_2: 57.374,51.491 57.374,52.141 56.984,51.946 56.984,51.686
  region net U3_1: 59.111,52.366 59.761,52.366 59.566,52.705 59.306,52.705
  region net OUT_+2.5V: 53.332,58.798 52.332,58.798 52.632,58.198 53.032,58.198
  region net VADC_IN: 93.909,65.689 94.559,65.689 94.364,66.079 94.104,66.079
  region net VADC_IN: 94.559,70.328 93.909,70.328 94.104,69.938 94.364,69.938
  region net VADC_IN: 93.685,70.51 93.685,71.145 93.383,70.955 93.383,70.701
  region net +5V: 94.785,72.928 94.785,71.928 95.385,72.228 95.385,72.628
  region net C6_2: 52.611,72.348 51.961,72.348 52.156,71.958 52.416,71.958
  region net C6_2: 51.968,73.448 52.603,73.448 52.413,73.829 52.159,73.829
  region net C6_2: 52.603,76.031 51.968,76.031 52.159,75.65 52.413,75.65
  region net +5V: 101.963,75.318 101.063,75.318 101.311,74.968 101.711,74.968
  region net R14_1: 103.09,76.318 103.663,75.499 103.893,76.216 103.661,76.549
  region net OUT_+5V: 53.234,65.297 52.408,65.861 52.176,65.293 52.512,65.063
  region net OUT_+5V: 53.508,66.296 53.508,65.297 54.108,65.596 54.108,65.996
  region net +5V: 53.508,64.381 53.508,63.497 54.108,63.681 54.108,64.081
  region net CERTAIN: 98.604,42.093 98.604,42.743 98.311,42.548 98.311,42.288
  region net RST: 74.468,43.168 75.118,43.168 74.923,43.558 74.663,43.558
  region net U3_13: 71.826,62.019 71.176,62.019 71.371,61.629 71.631,61.629
  region net U3_14: 71.051,63.467 71.051,64.117 70.661,63.922 70.661,63.662
  region net OUT_+2.5V: 49.809,49.709 50.267,49.709 50.238,49.496 49.838,49.496
  region net OUT_+2.5V: 50.057,53.39 49.734,53.067 49.603,53.238 49.886,53.521
  region net OUT_+2.5V: 50.331,53.002 50.085,53.387 50.278,53.482 50.498,53.136
  region net OUT_+5V: 53.994,62.407 53.671,62.084 53.54,62.255 53.823,62.538
  region net OUT_+5V: 53.746,57.456 54.204,57.456 54.175,57.243 53.775,57.243
  region net OUT_+5V: 56.057,59.417 55.734,59.74 55.905,59.871 56.188,59.588
  region net OUT_-5V: 59.74,65.17 59.417,64.847 59.588,64.716 59.871,64.999
  region net OUT_-5V: 54.535,66.827 54.535,67.285 54.322,67.256 54.322,66.856
  region net OUT_-5V: 54.939,66.827 54.939,67.285 55.152,67.256 55.152,66.856
  region net OUT_-5V: 46.28,61.493 46.28,61.951 46.067,61.922 46.067,61.522
  region net OUT_-5V: 57.329,66.827 57.329,67.285 57.116,67.256 57.116,66.856
  region net +5V: 54.408,63.652 54.408,64.11 54.195,64.081 54.195,63.681
  region net +5V: 72.796,66.727 73.254,66.727 73.225,66.514 72.825,66.514
  region net +5V: 72.796,67.131 73.254,67.131 73.225,67.344 72.825,67.344
  region net SETTING: 84.632,67.164 84.309,67.487 84.53,67.569 84.714,67.385
  region net CERTAIN: 85.496,65.353 85.954,65.353 85.855,65.566 85.595,65.566
  region net CERTAIN: 90.22,55.645 89.897,55.322 90.12,55.243 90.299,55.422
  region net P3.3: 85.204,61.02 84.747,61.048 84.858,61.255 85.118,61.239
  region net VCC: 48.787,51.485 48.464,51.162 48.333,51.333 48.616,51.616
  region net RXD: 83.712,64.212 83.389,64.535 83.307,64.314 83.491,64.13
  region net TXD: 95.175,59.969 95.175,60.427 94.962,60.328 94.962,60.068
  region net ADC_IN: 66.979,63.011 66.656,62.688 66.879,62.609 67.058,62.788
  region net OUT_LV: 55.905,64.822 56.363,64.822 56.264,64.609 56.004,64.609
  region net OUT_LV: 55.932,68.986 55.932,69.444 55.719,69.345 55.719,69.085
  region net OUT_LV: 56.438,69.196 56.115,69.519 56.336,69.601 56.52,69.417
  region net U3_14: 61.899,49.803 61.576,49.48 61.797,49.398 61.981,49.582
  region net U3_14: 62.026,63.481 61.703,63.804 61.924,63.886 62.108,63.702
  region net VADC_IN: 82.348,76.987 82.348,77.445 82.135,77.343 82.135,77.089
  region net VADC_IN: 91.236,77.235 90.913,76.912 91.136,76.833 91.315,77.012
  region net CERTAIN: 92.729,53.136 92.406,52.813 92.327,53.036 92.506,53.215
  region net ADC_IN: 68.543,70.192 69.176,69.559 69.247,70.079 69.063,70.263
  region net P3.4: 110.022,58.114 108.672,58.114 109.217,58.547 109.477,58.547
  region net P3.2: 104.465,58.397 103.371,57.605 103.442,58.434 103.655,58.589
  region net U4_31: 88.72,81.85 89.595,82.725 89.658,81.971 89.474,81.787
  region net U4_32: 86.18,81.852 87.055,82.727 87.118,81.973 86.934,81.79
  region net U4_33: 83.64,81.852 84.515,82.727 84.578,81.973 84.394,81.79
  region net U4_34: 81.103,81.857 81.978,82.732 82.04,81.979 81.857,81.795
  region net U4_35: 78.563,81.85 79.438,82.725 79.5,81.971 79.317,81.787
  region net +5V: 76.02,83.496 76.898,82.624 77.008,83.329 76.724,83.611
Bottom Layer:
  region net VCC: 55.596,43.195 55.896,43.195 55.945,43.795 55.545,43.795
  region net VCC: 56.234,42.418 55.604,43.195 56.258,43.341 56.512,43.028
  region net +5V: 53.903,41.895 53.603,41.895 53.553,41.295 53.953,41.295
  region net P1_1: 55.118,81.399 54.61,81.805 54.518,81.379 54.722,81.216
  region net VCC: 100.414,81.763 99.416,81.816 98.869,81.245 99.406,81.216
  region net OUT_+2.5V: 49.809,50.113 50.267,50.113 50.238,50.326 49.838,50.326
  region net OUT_+2.5V: 49.809,52.884 50.267,52.884 50.238,52.671 49.838,52.671
  region net OUT_+5V: 53.746,61.901 54.204,61.901 54.175,61.688 53.775,61.688
  region net OUT_+5V: 54.279,57.639 53.956,57.962 54.127,58.093 54.41,57.81
  region net OUT_+5V: 53.746,57.86 54.204,57.86 54.175,58.073 53.775,58.073
  region net OUT_+5V: 55.772,59.132 55.449,59.455 55.318,59.284 55.601,59.001
  region net OUT_-5V: 59.455,65.455 59.132,65.132 59.001,65.303 59.284,65.586
  region net OUT_-5V: 54.535,66.827 54.535,67.285 54.322,67.256 54.322,66.856
  region net OUT_-5V: 46.786,61.703 46.463,62.026 46.634,62.157 46.917,61.874
  region net OUT_-5V: 57.835,67.075 57.512,66.752 57.683,66.621 57.966,66.904
  region net +5V: 54.812,63.652 54.812,64.11 55.025,64.081 55.025,63.681
  region net +5V: 54.629,63.577 54.306,63.9 54.175,63.729 54.458,63.446
  region net +5V: 54.629,63.577 54.306,63.9 54.175,63.729 54.458,63.446
  region net +5V: 73.329,66.91 73.006,67.233 73.177,67.364 73.46,67.081
  region net +5V: 72.796,67.131 73.254,67.131 73.225,67.344 72.825,67.344
  region net CERTAIN: 86.029,65.17 85.706,64.847 85.929,64.768 86.108,64.947
  region net CERTAIN: 89.687,55.828 90.145,55.828 90.043,56.041 89.789,56.041
  region net P3.3: 84.734,60.631 85.192,60.631 85.093,60.418 84.833,60.418
  region net VCC: 48.539,50.979 48.997,50.979 48.968,50.766 48.568,50.766
  region net RXD: 83.997,64.497 83.674,64.82 83.895,64.902 84.079,64.718
  region net TXD: 95.579,59.969 95.579,60.427 95.792,60.325 95.792,60.071
  region net ADC_IN: 66.446,63.194 66.904,63.194 66.805,63.407 66.545,63.407
  region net OUT_LV: 55.905,65.226 56.363,65.226 56.264,65.439 56.004,65.439
  region net OUT_LV: 55.905,69.013 56.363,69.013 56.264,68.8 56.004,68.8
  region net U3_14: 61.439,50.046 61.874,49.906 61.852,50.138 61.592,50.221
  region net U3_14: 61.493,63.298 61.951,63.298 61.852,63.085 61.592,63.085
  region net VADC_IN: 82.752,76.987 82.752,77.445 82.965,77.343 82.965,77.089
  region net VADC_IN: 90.73,76.987 90.73,77.445 90.517,77.343 90.517,77.089
  region net ADC_IN: 67.984,69.633 68.617,69 68.097,68.929 67.913,69.113
  region net TXD: 105.593,81.826 104.526,82.333 104.701,81.64 104.945,81.524
  region net RXD: 102.923,81.784 101.96,82.467 102.015,81.752 102.23,81.599
  region net P1_1: 44.476,75.414 44.476,76.914 45.176,76.294 45.176,76.034
  region net P3.3: 103.369,72.075 104.323,71.121 103.493,71.06 103.309,71.244
  region net +5V: 76.693,82.128 75.455,82.128 75.874,81.55 76.274,81.55

## Silkscreen, mask and mechanical layers (free items; w line width, h text height)
Top Overlay:
  text "VCC RXD TXD GND" at 97.917,79.052 h0.9
  text "MinDSO" at 101.473,41.783 h2.03

## Text inside footprints (layer, text, board x,y; h text height)
OLED1: Top Overlay "1.3'OLED" at 76.962,59.725 h1.2; Top Overlay "4SPI-Connector" at 74.549,58.074 h1.2